# Altium PCB TIDA-01349-Interlock-Card_PCB.PcbDoc
Units mil, origin at the board's own origin, x right, y up, seen from the top; angles counter-clockwise.
Board outline 900 x 900 mil, 2 copper layers (Top Layer, Bottom Layer), stack 62 mil thick; 20 components, 17 nets, 76 pads, 19 vias.
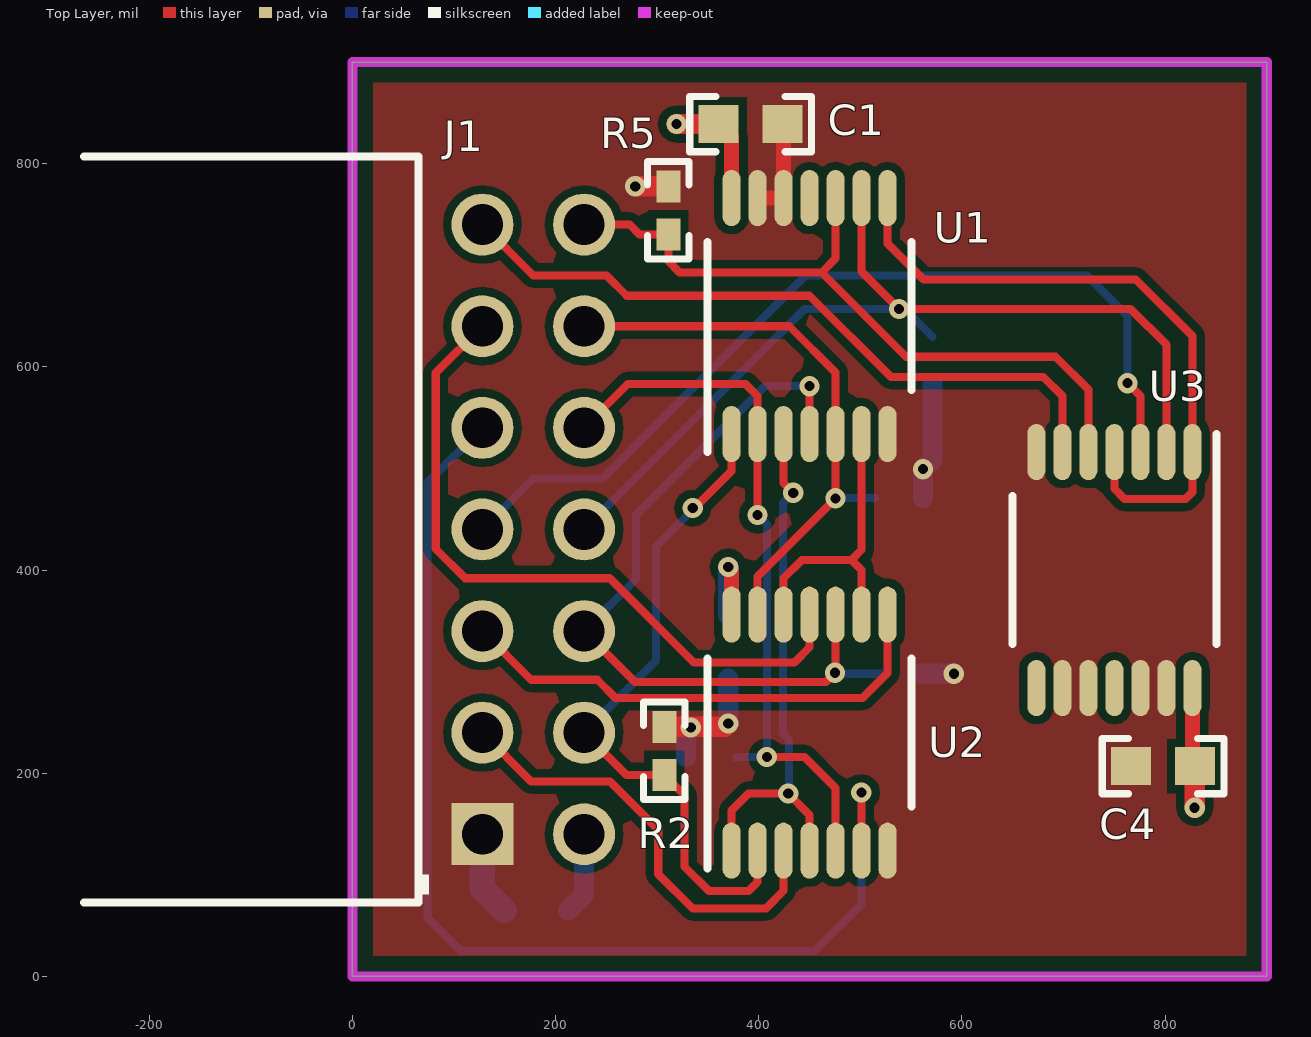
[diagram p0: Top Layer view]
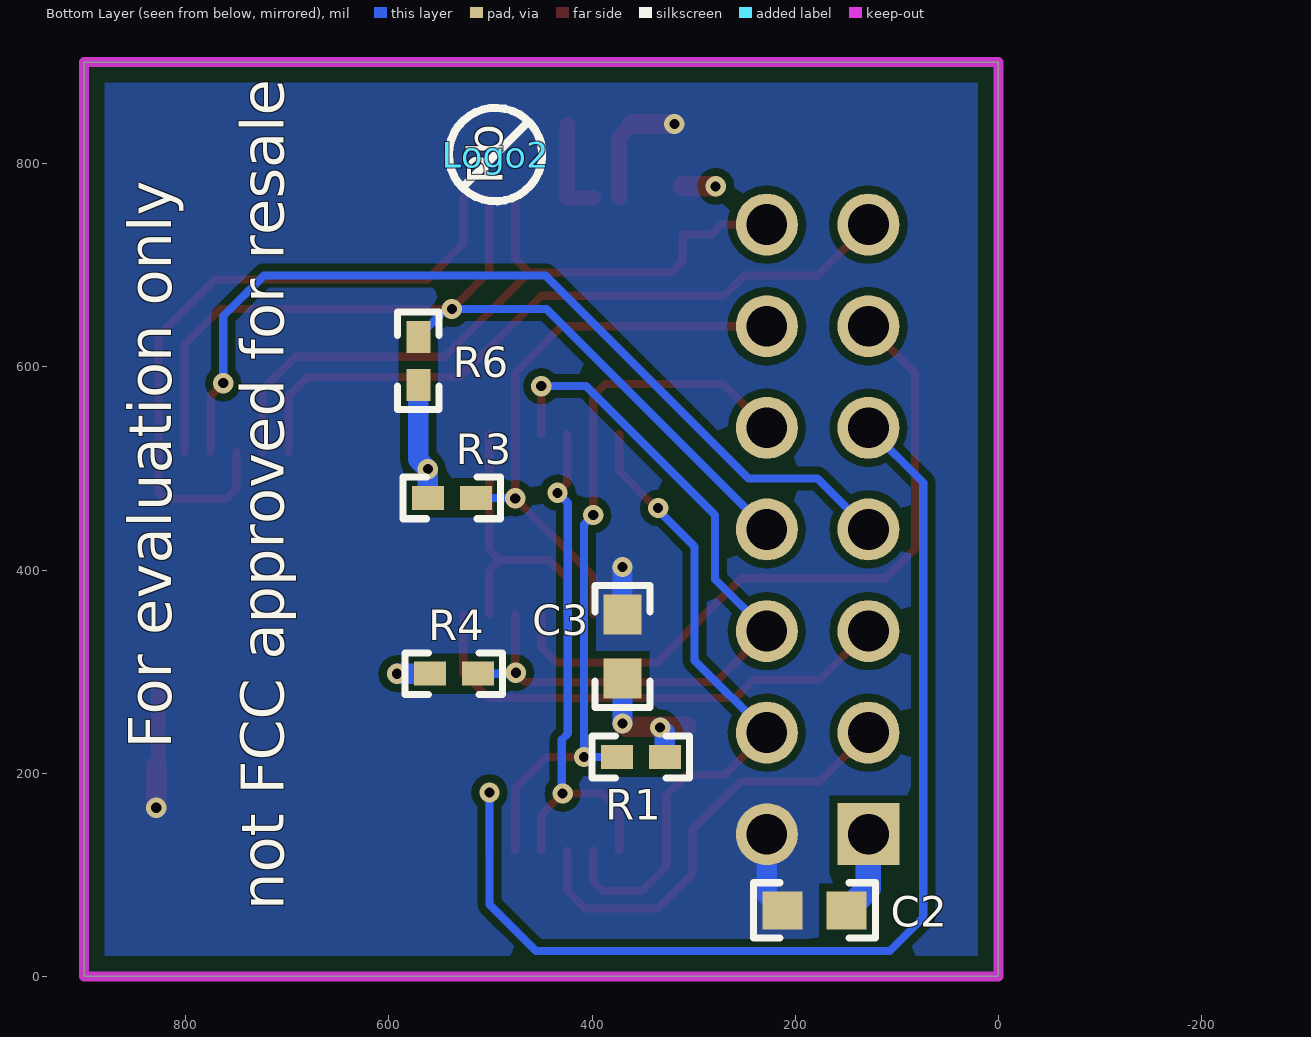
[diagram p1: Bottom Layer view, seen from below]

## Layer stack, top to bottom
Top Solder: solder mask 0.4, Solder Resist, Dk 3.5
Top Layer: signal copper 1.4
Dielectric1: core 59.2, FR-4 High Tg, Dk 4.8
Bottom Layer: signal copper 1.4
Bottom Solder: solder mask 0.4, Solder Resist, Dk 3.5

## Board outline
0,0 0,900 900,900 900,0

## Design rules (kind name [scope] priority, off if disabled: settings)
AcuteAngle [All] p1: minimum=4.50000000000000E+0001 checktracksonly=FALSE
AssemblyTestPointUsage [All] p1: valid=2
BoardOutlineClearance BoardOutlineClearance_MountingHoles [OnCopper and InComponentClass('Mounting Holes')] p1: gap=10 ignorepadtopadclearanceinfootprint=FALSE
BoardOutlineClearance BoardOutlineClearance_Poly [OnCopper and IsPoly] p2: gap=15 ignorepadtopadclearanceinfootprint=FALSE
BoardOutlineClearance [OnCopper and Not InComponentClass('Logo') and not InComponentClass('FiducialMark') and not InRegion(1000,500,4000,800) and not InPoly] p3: gap=10 ignorepadtopadclearanceinfootprint=FALSE
Clearance "Keepout to poly" [InPoly vs IsKeepOut] p1: gap=15 ignorepadtopadclearanceinfootprint=FALSE except(0: Arc-Hole Track-Hole SMDPad-Hole THPad-Hole Via-Hole Fill-Hole Poly-Hole Region-Hole Text-Hole)
Clearance Clearance_Keepouts [((IsTrack Or IsArc) And Not InPoly) And IsFree and IsKeepOut vs ((IsTrack Or IsArc) And Not InPoly) And IsFree and IsKeepOut] p2: gap=0 ignorepadtopadclearanceinfootprint=FALSE
Clearance Clearance_Poly [InPolygon] p3: gap=7.87 ignorepadtopadclearanceinfootprint=FALSE except(0: Arc-Hole Track-Hole SMDPad-Hole THPad-Hole Via-Hole Fill-Hole Poly-Hole Region-Hole Text-Hole)
Clearance Clearance_FiducialMark [IsKeepOut and InComponentClass('FiducialMark') vs IsPad and InComponentClass('FiducialMark')] p4: gap=0 ignorepadtopadclearanceinfootprint=FALSE
Clearance [All] p5: gap=7.87 ignorepadtopadclearanceinfootprint=FALSE except(0: Arc-Hole Track-Hole SMDPad-Hole THPad-Hole Via-Hole Fill-Hole Poly-Hole Region-Hole Text-Hole)
ComponentClearance ComponentClearance_MountingHoles_FiducialMarks [InComponentClass('Mounting Holes') vs InComponentClass('FiducialMark')] p1: gap=10 collisioncheckmode=3 verticalgap=10 showdistances=FALSE
ComponentClearance ComponentClearance_Shunt [InComponentClass('Header') vs InComponentClass('Shunt')] p2: gap=0 collisioncheckmode=3 verticalgap=0 showdistances=FALSE
ComponentClearance ComponentClearance_Logo [InComponentClass('Logo')] p3: gap=0 collisioncheckmode=3 verticalgap=0 showdistances=FALSE
ComponentClearance ComponentClearance_ScrewToNut [(HasFootprint('NY PMS 440 0025 PH')) vs (HasFootprint('Keystone_1902C'))] p4: gap=5 collisioncheckmode=3 verticalgap=10 showdistances=FALSE
ComponentClearance ComponentClearance_MountingHoles [InComponentClass('Mounting Holes')] p5: gap=10 collisioncheckmode=3 verticalgap=100000 showdistances=FALSE
ComponentClearance ComponentClearance_SmallPassives [HasFootprint('0201*') or HasFootprint('0402*') or HasFootprint('0508') or HasFootprint('0603*') or HasFootprint('0612') or HasFootprint('0805*') or HasFootprint('0815*') or HasFootprint('0830*') or HasFootprint('1206*') or HasFootprint('1210*') or HasFootprint('1808*') or HasFootprint('1812*') or HasFootprint('1825*') or HasFootprint('2010*') or HasFootprint('2220*') or HasFootprint('2225*') or HasFootprint('2512*') or HasFootprint('2728*') or HasFootprint('3518*') vs HasFootprint('0201*') or HasFootprint('0402*') or HasFootprint('0508') or HasFootprint('0603*') or HasFootprint('0612') or HasFootprint('0805*') or HasFootprint('0815*') or HasFootprint('0830*') or HasFootprint('1206*') or HasFootprint('1210*') or HasFootprint('1808*') or HasFootprint('1812*') or HasFootprint('1825*') or HasFootprint('2010*') or HasFootprint('2220*') or HasFootprint('2225*') or HasFootprint('2512*') or HasFootprint('2728*') or HasFootprint('3518*')] p6: gap=10 collisioncheckmode=3 verticalgap=10 showdistances=FALSE
ComponentClearance ComponentClearance_THtoSMT [IsThruComponent vs IsSMTComponent] p7: gap=10 collisioncheckmode=3 verticalgap=10 showdistances=FALSE
ComponentClearance ComponentClearance_THtoTH [IsThruComponent vs IsThruComponent] p8: gap=10 collisioncheckmode=3 verticalgap=10 showdistances=FALSE
ComponentClearance [All] p9: gap=0 collisioncheckmode=3 verticalgap=0 showdistances=FALSE
DiffPairsRouting [All] p1: maxlimit=100 minlimit=10 mostfreqgap=10 toplayer_minwidth=15 toplayer_maxwidth=15 toplayer_prefwidth=15 bottomlayer_minwidth=15 bottomlayer_maxwidth=15 bottomlayer_prefwidth=15 maxuncoupledlength=1000
FabricationTestPointUsage TestPointUsage [All] p1: valid=2 allowmultiple=FALSE
FabricationTestpoint Testpoint [All] p1: side=3 testpointundercomponent=TRUE minsize=40 maxsize=100 preferedsize=60 minholesize=0 maxholesize=40 preferedholesize=32 testpointgrid=1 allowsidetop=TRUE allowsidebottom=TRUE usegrid=TRUE gridtolerance=0.01
FanoutControl Fanout_LCC [IsLCC] p1: bgadir=Out bgaviamode=Centered fanoutstyle=Auto fanoutdirection=Alternating viagrid=1 // Fanout_LCC (Default Rule)
FanoutControl Fanout_BGA [IsBGA] p2: bgadir=Out bgaviamode=Centered fanoutstyle=Auto fanoutdirection=Alternating viagrid=1 // Fanout_BGA (Default Rule)
FanoutControl Fanout_Default [All] p4: bgadir=Out bgaviamode=Centered fanoutstyle=Auto fanoutdirection=Alternating viagrid=1 // Fanout_Default (Default Rule)
FanoutControl Fanout_Small [(CompPinCount < 5)] p5: bgadir=Out bgaviamode=Centered fanoutstyle=Auto fanoutdirection=OutThenIn viagrid=1 // Fanout_Small (Default Rule)
HoleSize [All] p1: absolutevalues=TRUE maxlimit=251 minlimit=7.87 maxpercent=80.000 minpercent=20.000
MinimumAnnularRing MinimumAnnularRing_ThermalPadVias [IsVia and InAnyComponent] p1: minimumring=5.91
MinimumAnnularRing [All] p2: minimumring=5
MinimumSolderMaskSliver MinimumSolderMaskSliver_Logo [InComponentClass('Logo') vs InComponentClass('Logo')] p1: minsoldermaskwidth=0.7
MinimumSolderMaskSliver [All] p2: minsoldermaskwidth=3.94
PlaneConnect [All] p1: planeconnectstyle=Direct reliefexpansion=10 reliefentries=4 reliefconductorwidth=10 reliefairgap=10
PolygonConnect [All] p1: connectstyle=Direct reliefconductorwidth=10 reliefentries=4 polygonreliefangle="90 Angle" airgapwidth=10
RoutingVias ThermalPadVias [IsVia and InAnyComponent] p1: holewidth=7.87 width=19.68 viastyle="Through Hole" minholewidth=7.87 minwidth=19.68 maxholewidth=12.99 maxwidth=23.62
RoutingVias [All] p2: holewidth=10 width=20 viastyle="Through Hole" minholewidth=7.87 minwidth=16 maxholewidth=12 maxwidth=24
SilkToBoardRegionClearance [Not ((IsComment or IsDesignator) And (Hide <> 'False')) and not InRegion(1000,500,4000,800)] p1:
SilkToSilkClearance SilkToSilkClearance_Pb-FreeLogo [(HasFootprint('Pb-Free_Overlay_Medium') OR HasFootprint('Pb-Free_Overlay_Small')) vs (HasFootprint('Pb-Free_Overlay_Medium') OR HasFootprint('Pb-Free_Overlay_Small'))] p1: silktosilkclearance=0
SilkToSilkClearance [All] p2: silktosilkclearance=4
SilkToSolderMaskClearance SilkToComponentPadClearance [(IsPad or IsFill or IsRegion) and InAnycomponent] p1: minsilkscreentomaskgap=5 clearancetoexposedcopper=TRUE
SilkToSolderMaskClearance "Silk to Solder Mask Opening" [All] p2: minsilkscreentomaskgap=4 clearancetoexposedcopper=FALSE
SolderMaskExpansion [All] p1: expansion=1.97
Width [All] p1: maxlimit=100 minlimit=6 preferedwidth=8 checkconnectedcopper=TRUE
15 further rules are at their usual default settings.

## Classes and differential pairs
component class TIDA-01349-Interlock-Card: C1 C2 C3 C4 J1 R1 R2 R3 R4 R5 R6 U1 U2 U3
component class AssemblyNote: ZZ1 ZZ2 ZZ3 ZZ4
component class TIDA-01349-Interlock-Card_EVM_Hardware: Logo2 Logo3 ZZ1 ZZ2 ZZ3 ZZ4

## Components (designator, comment, footprint, x,y, rotation, side; value= is the part's Value field where it differs from the comment)
C1 "C0603C104K5RACTU" 0603 392,839 r180 top value=0.1uF
C2 "C0603C104K5RACTU" 0603 181,65 r0 bottom value=0.1uF
C3 "C0603C104K5RACTU" 0603 370,324.64 r90 bottom value=0.1uF
C4 "C0603C104K5RACTU" 0603 798,207 r0 top value=0.1uF
J1 "PPTC072LJBN-RC" Sullins_xPxC072LJBN -270,440 r180 top
Logo2 "Pb-Free Symbol" Pb-Free_Overlay_Small 495,809 r90 bottom
Logo3 "FCC disclaimer" FCC_disclaimer 143,1544 r0 top
R1 "CRCW040210K0FKED" 0402 352,216 r0 bottom value=10.0k
R2 "CRCW040210K0FKED" 0402 307,222 r270 top value=10.0k
R3 "CRCW040210K0FKED" 0402 538,471 r180 bottom value=10.0k
R4 "CRCW040210K0FKED" 0402 536,298 r180 bottom value=10.0k
R5 "CRCW040210K0FKED" 0402 311,754 r270 top value=10.0k
R6 "CRCW040210K0FKED" 0402 571,606 r90 bottom value=10.0k
U1 "SN74LVC86APW" PW0014A_N 450,650 r90 top
U2 "SN74LVC08APW" PW0014A_N 450,240 r90 top
U3 "SN74LVC08APW" PW0014A_N 750,400 r270 top
ZZ1 "This Assembly Note is for PCB labels only" AssemblyNoteLabel 185,3938 r0 top
ZZ2 "These assemblies are ESD sensitive, ESD precautions shall be observed." AssemblyNote 185,3829.11 r0 top
ZZ3 "These assemblies must be clean and free from flux and all contaminants. Use of no clean flux is not acceptable." AssemblyNote 185,3740.56 r0 top
ZZ4 "These assemblies must comply with workmanship standards IPC-A-610 Class 2, unless otherwise specified." AssemblyNote 185,3652 r0 top

## Footprints (in the part's own frame and the unit in brackets; to place one, negate y for a bottom-side part, rotate by r counter-clockwise, add the part's x,y. Pads: shape width x height; smd on the part's side, far side on the other; paste and mask are expansions set on the pad)
0402 [mm] "0402 from SM-752 data"
  rect 0.8x0.6 smd: 1(-0.6,0) 2(0.6,0)
  silkscreen extent -1.22,-0.52 1.22,0.52, body extent -0.55,-0.3 0.55,0.3, height 0.6
0603 [mm] "0603 from SM-752 data"
  rect 1x0.95 smd: 1(-0.8,0) 2(0.8,0)
  silkscreen extent -1.52,-0.69 1.52,0.69, body extent -0.87,-0.47 0.87,0.47, height 1
AssemblyNote [mil] "Assembly Note"
AssemblyNoteLabel [mil] "Assembly Note for PCB Labels"
FCC_disclaimer [mil]
Pb-Free_Overlay_Small [mil]
  silkscreen extent -46,-46 46,46
PW0014A_N [mm] "TSOP, 14-Leads, Body 5x4.4mm, Pitch 0.65mm, IPC Medium Density"
  oval 1.4x0.45 smd: 1(-2.95,1.95) 2(-2.95,1.3) 3(-2.95,0.65) 4(-2.95,0) 5(-2.95,-0.65) 6(-2.95,-1.3) 7(-2.95,-1.95) 8(2.95,-1.95) 9(2.95,-1.3) 10(2.95,-0.65) 11(2.95,0) 12(2.95,0.65) 13(2.95,1.3) 14(2.95,1.95)
  silkscreen extent -3.4,-2.55 1.85,2.55, body extent -3.21,-2.5 3.21,2.5, height 1
Sullins_xPxC072LJBN [mm] "Receptacle, 2.54mm, 7x2, R/A, TH"
  rect 1.55x1.55 hole 1.02: 1(-10.109,7.62)
  round 1.55 hole 1.02: 2(-12.649,7.62) 3(-10.109,5.08) 4(-12.649,5.08) 5(-10.109,2.54) 6(-12.649,2.54) 7(-10.109,0) 8(-12.649,0) 9(-10.109,-2.54) 10(-12.649,-2.54) 11(-10.109,-5.08) 12(-12.649,-5.08) 13(-10.109,-7.62) 14(-12.649,-7.62)
  silkscreen extent -8.78,-9.32 -0.15,9.32, body extent -12.85,-9.32 0,9.32, height 5.08

## Part data
C1 C2 C3 C4: library part CMP-0006861-2, "CAP, CERM, 0.1 uF, 50 V, +/- 10%, X7R, 0603", Cap_Case=0603, Manufacturer=Kemet, Supplier Part Number 1=399-5089-1-ND, TempCo=X7R, Tolerance_%=10%, Value1=Unknown, Value2=50V, ValueDisplayed=0.1uF, AEC Category=Q200, AEC Qualified=?, Cap_F=100nF, ComponentLink1Description="Datasheet link", ComponentLink1URL=http://www.kemet.com/kemet/web/homepage/kechome.nsf/vapubfiles/F3102_Y5V.pdf/$file/F3102_Y5V.pdf, CompType=Capacitor, LatestRevisionDate=2017-03-09, MountType=SMT, PackageReference=0603, PartNumber=C0603C104K5RACTU, Polarized=N, Published=2008-06-19, Publisher="Texas Instruments", RoHS=Y, SizeArea_mm2=1.28, SizeAreaWB_mm2=4.68, SizeX_mm=1.6, SizeY_mm=0.8, SizeZ_mm=1, Supplier 1=Digi-Key, Supplier 2=Mouser, Supplier 3=Farnell, Supplier Part Number 2=80-C0603C104K5R, Supplier Part Number 3=1288255, TaMax_C=125°C, TaMin_C=-55°C, Technology=Ceramic, U/M=EA, VDC_V=50V
J1: library part CMP-0054673-1, "Receptacle, 2.54mm, 7x2, Tin, Black, R/A, TH", Color=Black, Current_A=3A, Manufacturer="Sullins Connector Solutions", Supplier Part Number 1=S5521-ND, Voltage_V=250V, Cert_UL=Y, CNHeader=FALSE, ComponentLink1Description="Datasheet URL", ComponentLink1URL=http://sullinscorp.com/drawings/101_P(N)PxCxx2LJBN-RC,_10494-H.pdf, CompType="Socket Strip", ContactFinish=Tin, CT=TRUE, Gender=Female, LatestRevisionDate=26/05/2017, MountType=TH, Orientation=R/A, PackageReference="Receptacle, 2.54mm, 7x2, R/A, TH", PartNumber=PPTC072LJBN-RC, PinCount=14, Pitch_mm=2.54, Publisher="Texas Instruments", RoHS=Y, Row_Count=2, RowSpacing_mm=2.54, Supplier 1=Digi-Key
Logo2: library part CMP-0074839-1, LatestRevisionDate=2017-07-06, Lib Reference=Pb-Free, PartNumber="Pb-Free Symbol", Published=2009-03-03, Publisher="Texas Instruments", SymbolCreator=a0412235, SymbolVersion=2011-08-22
Logo3: library part CMP-0074847-1, "FCC_disclaimer", LatestRevisionDate=2017-07-06, Lib Reference=FCC_disclaimer, PartNumber="FCC disclaimer", Published=2009-03-03, Publisher="Texas Instruments"
R1 R2 R3 R4 R5 R6: library part CMP-0025958-2, "RES, 10.0 k, 1%, 0.063 W, 0402", Manufacturer=Vishay-Dale, Power_W=63mW, Supplier Part Number 1=541-10.0KLCT-ND, TempCo="100 ppm/C", Tolerance_%=1%, Value2=0.063W, Value_Code=10k0, ValueDisplayed=10.0k, AEC Category=Q200, AEC Qualified=?, ComponentLink1Description="Datasheet link", ComponentLink1URL=http://www.vishay.com/docs/20035/dcrcwe3.pdf, CompType=Resistor, EIA_Code=E96, LatestRevisionDate=2017-03-09, MountType=SMT, PackageReference=0402, PartNumber=CRCW040210K0FKED, Published=2008-06-26, Publisher="Texas Instruments", Res_ohm=10k, RoHS=Y, SizeArea_mm2=0.5, SizeX_mm=1, SizeY_mm=0.5, SizeZ_mm=0.6, Supplier 1=Digi-Key, Supplier 2=Newark, Supplier 3=Mouser, Supplier Part Number 2=52K6595, Supplier Part Number 3=71-CRCW0402-10K-E3, Technology="Thick Film", U/M=EA, Value1=1%, VDC_V=50V
U1: library part CMP-0053460-1, "Quadruple 2-Input Exclusive-OR Gate, PW0014A, TUBE", F @ Nom Voltage(Max)(Mhz)=70, Generic Part Number=SN74LVC86A, ICC @ Nom Voltage(Max)(mA)=0.01, Manufacturer="Texas Instruments", Operating Temperature Range(C)="-40 to 125", Rating=Catalog, tpd @ Nom Voltage(Max)(ns)=9.9,7.6,5.6,4.6, Voltage(Nom)(V)=1.8,2.5,2.7,3.3, Bits(#)=4, DatasheetVersion=SCAS288P, Input Type=TTL, Output Drive (IOL/IOH)(Max)(mA)=24/-24, Output Type=TTL, PackageReference=PW0014A, PartId=1, Schmitt Trigger=No, Technology Family=LVC, VCC(Max)(V)=3.6, VCC(Min)(V)=1.65
U2 U3: library part CMP-0054498-1, "Quadruple 2-Input Positive-AND Gate, PW0014A, TUBE", F @ Nom Voltage(Max)(Mhz)=70, Generic Part Number=SN74LVC08A, ICC @ Nom Voltage(Max)(mA)=0.01, Manufacturer="Texas Instruments", Operating Temperature Range(C)="-40 to 125", Rating=Catalog, tpd @ Nom Voltage(Max)(ns)=9.8,6.9,4.8,4.1, Voltage(Nom)(V)=1.8,2.5,2.7,3.3, Bits(#)=4, DatasheetVersion=SCAS283Q, Input Type=TTL, Output Drive (IOL/IOH)(Max)(mA)=-24/24, Output Type=TTL, PackageReference=PW0014A, PartId=1, Schmitt Trigger=No, Technology Family=LVC, VCC(Max)(V)=3.6, VCC(Min)(V)=1.65
ZZ1: library part CMP-0003616-3, ClassName=AssemblyNote, CompType=AssemblyNote, Key=AssemblyNoteLabel, LatestRevisionDate=2017-03-09, Publisher="Texas Instruments"
ZZ2: library part CMP-0077236-1, ClassName=AssemblyNote, CompType=AssemblyNote, Key=AssemblyNote, LatestRevisionDate=2017-08-10, Publisher="Texas Instruments"
ZZ3: library part CMP-0077237-1, ClassName=AssemblyNote, CompType=AssemblyNote, Key=AssemblyNote, LatestRevisionDate=2017-08-10, Publisher="Texas Instruments"
ZZ4: library part CMP-0077238-1, ClassName=AssemblyNote, CompType=AssemblyNote, Key=AssemblyNote, LatestRevisionDate=2017-08-10, Publisher="Texas Instruments"

## Via types
v1: diameter 20, hole 10, Top Layer to Bottom Layer, 19 vias

## Nets (pads, with @x,y where several pads share a name; then routed paths per layer and width w, separated by ;. In a path a pad name is that pad's centre, name@x,y a point inside that pad or via, vN(x,y) a via of type N, cw(c..) or ccw(c..) an arc to the next point about the centre after c; other vN are vias at no path point)
3V3: C1.2 C2.2 C3.2 C4.2 J1.2 U1.14 U2.14 U3.14 | length 415.3
  Top Layer w15: C1.2 373.23,826.28 U1.14 ; v1(370,403) 373.23,399.77 U2.14 ; U3.14 826.77,209.72 C4.2
  Top Layer w20: v1(319,839) C1.2 ; v1(829,166) 829,206.5 C4.2
  Bottom Layer w20: C2.2 228,80.5 J1.2 ; C3.2 v1(370,403)
GND: C1.1 C2.1 C3.1 C4.1 J1.1 R1.1 R2.1 R3.1 R4.1 R5.1 R6.1 U1.7 U1.12 U1.13 U2.7 U3.7 U3.9 U3.10 U3.12 U3.13 | length 501.2
  Top Layer w15: U1.13 U1.12 C1.1@424.41,838.09
  Top Layer w20: v1(278.38,777.62) R5.1 ; R2.1 366.62,245.62 v1(370,249)
  Bottom Layer w20: R1.1 328.38,240.38 v1(333,245) ; v1(370,249) C3.1 ; R4.1 v1(592,298) ; R3.1 v1(561.62,499.38) 571,508.76 R6.1
  Bottom Layer w25: J1.1 128,86.5 C2.1
NetU1_3: U1.3 U2.1 U2.4 | length 531.8
  Top Layer w8: U2.1 373.23,163.23 390,180 v1(429,180) 450,159 U2.4 ; U1.3 424.41,485.59 v1(434,476)
  Bottom Layer w8: v1(429,180) 429.87,180.87 429.87,233 423.87,239 423.87,465.87 v1(434,476)
NetU1_6: U1.6 U2.9 U2.12 | length 296.1
  Top Layer w8: U2.12 424.41,391.96 442.45,410 491.18,410 ; U2.9 501.18,400 491.18,410 ; U1.6 501.18,420 491.18,410
NetU1_8: U1.8 U3.1 U3.4 | length 655.9
  Top Layer w8: U1.8 526.77,721.23 562,686 771,686 826.77,630.23 U3.1 826.77,476.77 820,470 760,470 750,480 U3.4
PWM_U_B: J1.10 R1.2 U1.2 U2.5 | length 725.1
  Top Layer w8: J1.10 271,583 387,583 398.82,571.18 U1.2 v1(398.82,454.18) ; v1(408,216) 445,216 475.59,185.41 U2.5
  Bottom Layer w8: R1.2@377.62,215 378.62,216 v1(408,216) 408,445 v1(398.82,454.18)
PWM_U_T: J1.4 R2.2 U1.1 U2.2 | length 666.5
  Top Layer w8: J1.4 269.62,198.38 R2.2 327,178.38 327,108 351,84 390,84 398.82,92.82 U2.2 ; v1(335,461) 336.89,461 373.23,497.34 U1.1
  Bottom Layer w8: J1.4 299,311 299,423.11 335,459.11 v1(335,461)
PWM_UB: J1.9 U2.6 | length 1131.3
  Top Layer w8: v1(501,181) 501.18,180.82 U2.6
  Bottom Layer w8: J1.9 74,486 74,58 107,25 455,25 501,71 v1(501,181)
PWM_UT: J1.3 U2.3 | length 440.2
  Top Layer w8: J1.3 176,192 253.55,192 301,144.55 301,101 335,67 407,67 424.41,84.41 U2.3
PWM_V_B: J1.12 R3.2 U1.5 U2.13 | length 575.5
  Top Layer w8: J1.12 430,640 475.59,594.41 U1.5 v1(475.59,470.59) 398.82,393.82 U2.13
  Bottom Layer w8: v1(475.59,470.59) 476,471 R3.2
PWM_V_T: J1.6 R4.2 U1.4 U2.10 | length 788.5
  Top Layer w8: J1.6 278,290 466,290 v1(475,299) ; U1.4 v1(450,581) ; v1@475,293 v1(475,299) ; U2.10 475.59,299.59 v1(475,299)
  Bottom Layer w8: J1.6 279,391 279,454 406,581 v1(450,581) ; v1(475,299) 476,298 R4.2 R4.2@522.38,298
PWM_VB: J1.11 U2.11 | length 690.8
  Top Layer w8: J1.11 82,594 82,421 111,392 253,392 336,309 435,309 450,324 U2.11
PWM_VT: J1.5 U2.8 | length 493.7
  Top Layer w8: J1.5 176,292 241,292 259,274 502,274 526.77,298.77 U2.8
PWM_W_B: J1.14 R5.2 U1.10 U3.5 | length 719.4
  Top Layer w8: J1.14 273,740 282.62,730.38 R5.2 311,704 322,693 462,693 ; U1.10 475.59,706.59 462,693 ; U3.5 724.41,577.59 692,610 545,610 462,693
PWM_W_T: J1.8 R6.2 U1.9 U3.2 | length 952
  Top Layer w8: U1.9 501.18,693.82 v1(538,657) 766,657 801.18,621.82 U3.2
  Bottom Layer w8: J1.8 445,657 v1(538,657) 543.62,657 R6.2
PWM_WB: J1.13 U3.6 | length 695.8
  Top Layer w8: J1.13 178,690 250,690 270,670 450,670 530,590 680,590 698.82,571.18 U3.6
PWM_WT: J1.7 U3.3 | length 894.2
  Top Layer w8: v1(763,584) 775.59,571.41 U3.3
  Bottom Layer w8: J1.7 178,490 246,490 446,690 723,690 763,650 v1(763,584)
pads on no net: U1.11 U3.8 U3.11

## Polygon pours and split planes (outlines as drawn)
GND on Top Layer "TOP_LAYER_GND_P002" (solid, remove dead copper, pour order 2): 0,900 0,0 900,0 900,899 899,900
3V3 on Bottom Layer "BOTTOM_LAYER_3V3_P004" (solid, remove dead copper, pour order 4): 0,899 0,-1 899,-1 900,0 900,899 899,900 1,900

## Keep-outs
Keep-Out Layer:
  the board outline again, w10
  text ".Layer_Name" at 577,-858.49 h60

## Other copper
Top Layer:
  text ".Layer_Name" at 577,-858.49 h60
Bottom Layer:
  text ".Layer_Name" at 577,-858.49 h60

## Silkscreen, mask and mechanical layers (free items; w line width, h text height)
Top Overlay:
  text ".Layer_Name" at 577,-858.49 h60
Bottom Overlay:
  text "For evaluation only" at 800,224 h72.83 r270
  text "not FCC approved for resale" at 689,65 h72.83 r270
  text ".Layer_Name" at 577,-858.49 h60
Top Paste:
  text ".Layer_Name" at 577,-858.49 h60
Bottom Paste:
  text ".Layer_Name" at 577,-858.49 h60
Top Solder:
  text ".Layer_Name" at 577,-858.49 h60
  text ".Layer_Name" at 577,-858.49 h60
Bottom Solder:
  text ".Layer_Name" at 577,-858.49 h60
Drill Guide:
  text ".Layer_Name" at 577,-858.49 h60
M1 Board Outline:
  the board outline again, w10
M2 Board Dimensions:
  rectangle: 125,-400 500,-275
  rectangle: 0,-275 125,-150
  lines w7: 0,-275 1000,-275 ; 125,-400 125,-150 ; 250,-400 250,-150 ; 500,-400 500,-150 ; 750,-400 750,-150 ; 0,-400 0,-150 1000,-150 1000,-400 0,-400
M3 3D STEP Top:
  text ".Layer_Name" at 577,-858.49 h60
M4 3D STEP Bottom:
  text ".Layer_Name" at 577,-858.49 h60
M5 Assembly Top:
  lines w10: -292,-930.17 6308,-930.17 ; -292,-726.83 6310,-726.83 ; -292,-523.5 -292,-1133.5 3713,-1133.5 6310,-1133.5 6310,-523.5 -291.5,-523.5 -291.5,-1133.5 1284,-1133.5 ; 2173,-1133.5 2173,-523.5 ; 3440,-726.83 3440,-523.5 ; 4280,-726.83 4280,-523.5 ; 4902,-1140 4902,-937.17
  text "COMPONENTS MARKED 'DNP' SHOULD NOT BE POPULATED." at 1153.5,-318.5 h60
  text "ASSEMBLY VARIANT:" at 1153,-434 h60
  text ".VariantName" at 2189,-434 h60
  text "PCB VIEWED FROM TOP SIDE" at -228.5,-655.67 h60
  text "BOARD #:" at 2248,-655.67 h60
  text ".PRJ_Number" at 2793.5,-655.67 h60
  text "REV:" at 3638,-655.67 h60
  text ".PCB_Rev" at 3929.5,-655.67 h60
  text "SVN REV:" at 4476,-655.67 h60
  text ".VersionControl_RevNumber" at 4982,-655.67 h60
  text "'.Layer_Name'" at 630,-856 h60
  text "TID #:" at 2248,-859 h60
  text ".TID" at 2793.5,-859 h60
  text "PLOT NAME =" at -228.5,-1064.34 h60
  text ".plot_File_Name" at 577,-1064.34 h60
  text "GENERATED    :" at 2250,-1064.34 h60
  text ".Print_Date" at 3119.5,-1064.34 h60
  text ".Print_Time" at 3848.5,-1064.34 h60
  text "TEXAS INSTRUMENTS" at 5113,-1064.34 h60
M6 Assembly Bottom:
  lines w10: -292.5,-727.33 6309.5,-727.33 ; -290.5,-930.67 6309.5,-930.67 ; 1115.5,-1140.5 1115.5,-937.67 ; 1737.5,-727.33 1737.5,-524 ; 2577.5,-727.33 2577.5,-524 ; 3844.5,-1134 3844.5,-524 ; 4733.5,-1134 6309,-1134 6309,-524 -292.5,-524 -292.5,-1134 2304.5,-1134 6309.5,-1134 6309.5,-524
  text "COMPONENTS MARKED 'DNP' SHOULD NOT BE POPULATED." at 6102,-318 h60
  text ".VariantName" at 5058,-434 h60
  text "ASSEMBLY VARIANT:" at 6097,-434 h60
  text ".VersionControl_RevNumber" at 1035.5,-656.17 h60
  text "SVN REV:" at 1541.5,-656.17 h60
  text ".PCB_Rev" at 2088,-656.17 h60
  text "REV:" at 2379.5,-656.17 h60
  text ".PRJ_Number" at 3224,-656.17 h60
  text "BOARD #:" at 3769.5,-656.17 h60
  text "PCB VIEWED FROM BOTTOM SIDE" at 6246,-656.17 h60
  text ".TID" at 3224,-859.5 h60
  text "TID #:" at 3769.5,-859.5 h60
  text "'.Layer_Name'" at 570,-861 h60
  text "TEXAS INSTRUMENTS" at 904.5,-1064.84 h60
  text ".Print_Time" at 2169,-1064.84 h60
  text ".Print_Date" at 2898,-1064.84 h60
  text "GENERATED    :" at 3767.5,-1064.84 h60
  text ".plot_File_Name" at 5440.5,-1064.84 h60
  text "PLOT NAME =" at 6246,-1064.84 h60
M9 Title Sheet:
  drawing of 57 lines, arcs and shapes, not listed
  text "1" at 739.84,8036.5 h70
  text "2" at 3235.5,8036.5 h70
  text "3" at 5724.84,8036.5 h70
  text "4" at 8231.51,8036.5 h70
  text "5" at 10730.5,8036.5 h70
  text "6" at 13235.5,8036.5 h70
  text "A" at -416.5,6893.5 h70
  text "A" at 14383.5,6893.5 h70
  text "B" at -416.5,4513.5 h70
  text "B" at 14383.5,4513.5 h70
  text "C" at -416.5,2138.5 h70
  text "C" at 14383.5,2138.5 h70
  text "PROJECT TITLE:" at 11343.5,277.5 h45
  text ".PRJ_Title" at 11393.5,144.17 h70
  text "DESIGNED FOR:" at 11343.5,-23.5 h45
  text ".PRJ_Customer" at 11393.5,-163.5 h70
  text "D" at -416.5,-231.5 h70
  text "D" at 14383.5,-231.5 h70
  text "FILE NAME:" at 11343.5,-323.5 h45
  text ".PCB_File_Name_No_Path" at 11393.5,-443.5 h70
  text "Texas Instruments (TI) and/or its licensors do not warrant the accuracy or completeness of this specification" at 6374,-605.34 h45
  text "ENGINEER:" at 11343.5,-613.5 h45
  text "LAYOUT BY:" at 12848.5,-613.5 h45
  text "or any information contained therein. TI and/or its licensors do not warrant that this design will meet" at 6329.01,-718 h45
  text ".PRJ_Engineer" at 11393.5,-768.49 h70
  text ".PCB_Layout" at 12899,-768.49 h70
  text "the specifications, will be suitable for your application or fit for any particular purpose, or will operate in" at 6329.01,-830.67 h45
  text "ALTIUM DESIGNER VERSION:" at 12848.5,-923.5 h45
  text "an implementation. TI and/or its licensors do not warrant that the design is production worthy. You should" at 6329.01,-943.33 h45
  text "completely validate and test your design implementation to confirm the system functionality for your application." at 6374,-1056 h45
  text ".print_Scale" at 11393.5,-1056.83 h70
  text ".Application_BuildNumber" at 12899,-1056.83 h70
  text "1" at 739.84,-1263.5 h70
  text "2" at 3235.5,-1263.5 h70
  text "3" at 5724.84,-1263.5 h70
  text "4" at 8231.51,-1263.5 h70
  text "5" at 10730.5,-1263.5 h70
  text "6" at 13235.5,-1263.5 h70
M10 Fab Notes:
  drawing of 189 lines, arcs and shapes, not listed
  text "DESIGN INFORMATION" at 12382.02,6356.17 h60
  text "MIN. TRACK WIDTH:" at 11737.46,6224.05 h60
  text "8" at 12833.7,6224.05 h60
  text "MIL" at 12988.46,6224.05 h60
  text "MIN. CLEARANCE:" at 11737.46,6099.92 h60
  text "0.2" at 12773.7,6099.93 h60
  text "mm" at 12988.46,6099.92 h60
  text "MIN. VIA PAD SIZE:" at 11737.46,5975.8 h60
  text "20" at 12803.71,5975.8 h60
  text "MIL" at 12988.46,5975.8 h60
  text "0.05mm (2MIL)" at 12432.46,5845.9 h60
  text "MINIMUM ANNULAR RING" at 11408.23,5837.67 h60
  text "EXTERNAL" at 13140.46,5837.67 h60
  text "PER" at 11608.23,5727.55 h60
  text "IPC-D-275 CLASS 2 LEVEL C" at 11828.23,5727.54 h60
  text "MIL, HOLES" at 13316.46,5627.07 h60
  text "+/-" at 12924,5618.48 h60
  text "+/-" at 13778,5618.48 h60
  text "REGISTRATION TOLERANCES:" at 11408.23,5617.42 h60
  text "METAL" at 12608,5617.42 h60
  text "5" at 13184.2,5617.42 h60
  text "3" at 14017.2,5617.42 h60
  text "MIL" at 14133.46,5617.42 h60
  text "HOLE SIZE TOLERANCE (UNLESS OTHERWISE SPECIFIED):" at 11408.23,5519.1 h60
  text "+/-" at 13778,5516.23 h60
  text "3" at 14017.2,5515.17 h60
  text "MIL" at 14133.46,5515.17 h60
  text "MATERIAL:" at 11333.46,5377.52 h60
  text "FR-4 High Tg" at 12319.9,5249 h60
  text "X" at 12175.46,5241.01 h60
  text "FR-408" at 11754.46,5236.49 h60
  text "OTHER" at 13242.46,5236.49 h60
  text "62 MIL (1.6mm) +/-10%" at 12074.56,5093.46 h60
  text "X" at 11954.46,5091.01 h60
  text "THICKNESS:" at 11408.23,5085.24 h60
  text "OTHER" at 13359.46,5085.24 h60
  text "TOLERANCE:" at 11408.23,4946.92 h60
  text "X" at 12256.46,4946.92 h60
  text "ANSI IPC-6012 TYPE 3 CLASS 2" at 12434.48,4946.92 h60
  text "OTHER +/-" at 12434.46,4802.73 h60
  text "BOW & TWIST:" at 11408.23,4657.54 h60
  text "X" at 12256.46,4657.54 h60
  text "ANSI IPC-6012 TYPE 3 CLASS 2" at 12434.48,4657.54 h60
  text "OTHER +/-" at 12434.46,4510.85 h60
  text "DRILLING:" at 11333.46,4380.23 h60
  text "NC_DRILL FILES" at 13094.46,4275.04 h60
  text "REFERENCE:" at 11408.23,4271.1 h60
  text "X" at 12065.46,4271.01 h60
  text "AS SHOWN" at 12243.46,4271.1 h60
  text "X" at 12966.46,4271.1 h60
  text "OTHER" at 13392.46,4128.85 h60
  text "PTH COPPER THICKNESS:" at 11407.91,4125.32 h60
  text "X" at 12547.14,4125.32 h60
  text "20-30 um" at 12675.14,4125.32 h60
  text "BOARD FINISH:" at 11333.46,3977.73 h60
  text "SILKSCREEN:" at 11488.68,3867.6 h60
  text "X" at 12446.46,3867.6 h60
  text "TOP" at 12563.46,3867.6 h60
  text "X" at 12956.46,3867.6 h60
  text "BOTTOM" at 13074.46,3867.6 h60
  text "SILKSCREEN COLOR:" at 11488.68,3712.41 h60
  text "X" at 12445.46,3712.41 h60
  text "WHITE" at 12563.46,3712.41 h60
  text "OTHER" at 13074.46,3712.41 h60
  text "X" at 12576.46,3568.96 h60
  text "GREEN" at 12694.46,3568.96 h60
  text "OTHER" at 13312.46,3568.96 h60
  text "SOLDER RESIST COLOR:" at 11488.68,3562.1 h60
  text "X" at 12576.46,3414.71 h60
  text "MATTE" at 12694.46,3414.71 h60
  text "SEMI-GLOSS" at 13312,3414.07 h60
  text "IMMERSION GOLD (ENIG)" at 12394.46,3241.94 h60
  text "ENEPIG" at 13732,3234.72 h60
  text "SURFACE FINISH:" at 11333.46,3233.72 h60
  text "X" at 12216.46,3233.72 h60
  text "IMM. TIN/SILVER OR EQUIV" at 11663,3096.4 h60
  text "OTHER" at 13094.46,3092.47 h60
  text "ARRAY/PANEL:" at 11333.46,2937.09 h60
  text "CUT AND TRIM PER M1 BOARD OUTLINE" at 12394.46,2928.87 h60
  text "X" at 12206,2926 h60
  text "N.C. ROUTE" at 12394.46,2792.9 h60
  text "V. SCORE" at 13260.46,2792.9 h60
  text "CERTIFICATION:" at 11333.46,2663.77 h60
  text "MATERIALS AND WORKMANSHIP FOR ALL PCBS" at 12058.46,2663.77 h60
  text "TO MEET OR EXCEED THE REQUIREMENTS OF:" at 12058.46,2569.71 h60
  text "X" at 11695.97,2441.08 h60
  text "ANSI IPC-A-600F CLASS ->" at 11823.96,2441.08 h60
  text "X" at 13471.97,2441.08 h60
  text "2" at 13581.96,2441.08 h60
  text "1" at 13266.96,2439.58 h60
  text "3" at 13935.96,2439.58 h60
  text "X" at 12507.97,2293.39 h60
  text "RoHS" at 12635.96,2293.39 h60
  text "OTHER" at 13280.36,2293.39 h60
  text "PER ORDER" at 13677.42,2293.39 h60
  text "ALL BOARDS MUST MEET OR EXCEED UL94-V0 REQUIREMENTS." at 11361,2139.57 h60
  text "PCB MUST BEAR THE UL94V-0 UL REGISTERED MATERIAL ID NUMBER" at 11361,2023.5 h60
  text "ADDITIONAL REQUIREMENTS:" at 11333.46,1854.08 h60
  text "MICROSECTION:" at 11408.23,1746.95 h60
  text "YES" at 12313.96,1746.95 h60
  text "REQUIRED" at 13175.46,1602.62 h60
  text "BARE BOARD ELEC. TEST:" at 11408.23,1599.76 h60
  text "NONE" at 12713.96,1599.76 h60
  text "X" at 13057.46,1599.76 h60
  text "PER ORDER" at 13767.46,1599.76 h60
  text "XX MIL VIAS REQUIRE NON-CONDUCTIVE FILL AND PLANARIZE" at 11576.38,1394.82 h59
  text "XX MIL VIAS REQUIRE CONDUCTIVE FILL AND PLANARIZE" at 11584.38,1290.84 h60
  text "OUTER XX MIL VIAS REQUIRE 50 OHM SINGLE-ENDED IMPEDANCE" at 11583.39,1127.46 h58
  text "LAYER 2 & 3 (INNER LAYERS) XX MIL WIDE, XX MIL SPACE / TRACES REQUIRE 100 OHM DIFFERENTIAL IMPEDANCE" at 11575.39,891.74 h60
M11 Gerber Information:
  lines w10: -292,-930.17 6308,-930.17 ; -292,-726.83 6310,-726.83 ; -292,-523.5 -292,-1133.5 3713,-1133.5 6310,-1133.5 6310,-523.5 -291.5,-523.5 -291.5,-1133.5 1284,-1133.5 ; 2173,-1133.5 2173,-523.5 ; 3440,-726.83 3440,-523.5 ; 4280,-726.83 4280,-523.5 ; 4902,-1140 4902,-937.17
  text "ALL ARTWORK VIEWED FROM TOP SIDE" at -228.5,-655.67 h60
  text "BOARD #:" at 2248,-655.67 h60
  text ".PRJ_Number" at 2793.5,-655.67 h60
  text "REV:" at 3638,-655.67 h60
  text ".PCB_Rev" at 3929.5,-655.67 h60
  text "SVN REV:" at 4476,-655.67 h60
  text ".VersionControl_RevNumber" at 4982,-655.67 h60
  text "LAYER NAME =" at -228.5,-858.49 h60
  text "TID #:" at 2248,-859 h60
  text ".TID" at 2793.5,-859 h60
  text "PLOT NAME =" at -228.5,-1064.34 h60
  text ".plot_File_Name" at 577,-1064.34 h60
  text "GENERATED    :" at 2250,-1064.34 h60
  text ".Print_Date" at 3119.5,-1064.34 h60
  text ".Print_Time" at 3848.5,-1064.34 h60
  text "TEXAS INSTRUMENTS" at 5113,-1064.34 h60
M12 Stackup:
  drawing of 191 lines, arcs and shapes, not listed
  text "Layer" at 9811.09,7573 h60
  text "Name" at 10221,7573 h60
  text "Material" at 11150.74,7573 h60
  text "Thickness" at 12010.51,7573 h60
  text "Constant" at 12660.35,7573 h60
  text "Board Layer Stack" at 13230.21,7573 h60
  text "1" at 9811.09,7453 h60
  text "Top Overlay" at 10221,7453 h60
  text "2" at 9811.09,7333 h60
  text "Top Solder" at 10221,7333 h60
  text "Solder Resist" at 11150.74,7333 h60
  text "0.40mil" at 12010.51,7333 h60
  text "3.5" at 12660.35,7333 h60
  text "3" at 9811.09,7213 h60
  text "Top Layer" at 10221,7213 h60
  text "Copper" at 11150.74,7213 h60
  text "1.40mil" at 12010.51,7213 h60
  text "4" at 9811.09,7093 h60
  text "Dielectric1" at 10221,7093 h60
  text "FR-4 High Tg" at 11150.74,7093 h60
  text "59.20mil" at 12010.51,7093 h60
  text "4.8" at 12660.35,7093 h60
  text "5" at 9811.09,6973 h60
  text "Bottom Layer" at 10221,6973 h60
  text "Copper" at 11150.74,6973 h60
  text "1.40mil" at 12010.51,6973 h60
  text "6" at 9811.09,6853 h60
  text "Bottom Solder" at 10221,6853 h60
  text "Solder Resist" at 11150.74,6853 h60
  text "0.40mil" at 12010.51,6853 h60
  text "3.5" at 12660.35,6853 h60
  text "7" at 9811.09,6733 h60
  text "Bottom Overlay" at 10221,6733 h60
M13 Component Bodies Top:
  text ".Layer_Name" at 577,-858.49 h60
M14 Component Bodies Bottom:
  text ".Layer_Name" at 577,-858.49 h60
M15 Courtyards Top:
  text ".Layer_Name" at 577,-858.49 h60
M16 Courtyards Bottom:
  text ".Layer_Name" at 577,-858.49 h60
Drill Drawing:
  circle w10: c1346.72,966.24 r27.63
  lines w10: 1319.09,1118.19 1374.34,1118.19 1346.72,1062.94 1319.09,1118.19
  lines w12: 1269,901.32 4500.49,901.32 ; 1269,1149.96 4500.49,1149.96 ; 1606.86,777 1606.86,1274.28 ; 1938.86,777 1938.86,1274.28 ; 2575.43,777 2575.43,1274.28 ; 2834.57,777 2834.57,1274.28 ; 3209.72,777 3209.72,1274.28 ; 3934.05,777 3934.05,1274.28 ; 1269,777 4500.49,777 4500.49,1274.28 1269,1274.28 1269,777
  text "Symbol" at 1343.59,1187.26 h72
  text "Quantity" at 1644.16,1187.26 h72
  text "Finished Hole Size" at 1976.16,1187.26 h72
  text "Plated" at 2612.72,1187.26 h72
  text "Hole Type" at 2871.86,1187.26 h72
  text "Drill Layer Pair" at 3247.02,1187.26 h72
  text "Hole Tolerance" at 3971.35,1187.26 h72
  text "19" at 1644.16,1062.94 h60
  text "10.00mil (0.254mm)" at 1976.16,1062.94 h60
  text "PTH" at 2612.72,1062.94 h60
  text "Round" at 2871.86,1062.94 h60
  text "Top Layer - Bottom Layer" at 3247.02,1062.94 h60
  text "14" at 1644.16,938.62 h60
  text "40.16mil (1.020mm)" at 1976.16,938.62 h60
  text "PTH" at 2612.72,938.62 h60
  text "Round" at 2871.86,938.62 h60
  text "Top Layer - Bottom Layer" at 3247.02,938.62 h60
  text "33 Total" at 1644.16,814.3 h60
  text "Tolerance:" at 1317,629 h50
  text "For 10 mil +0/-10mil" at 1317,495 h50
  text "For PTH +/-3mil" at 1317,397 h50
  text ".Layer_Name" at 577,-858.49 h60
M17 Embedded Cavity:
  text ".Layer_Name" at 577,-858.49 h60
M18 Embedded Assembly:
  text ".Layer_Name" at 577,-858.49 h60
M19 Embedded Keepout:
  text ".Layer_Name" at 577,-858.49 h60

## Dimensions
0,0 to 900,0 on M2 Board Dimensions
0,900 to 0,0 on M2 Board Dimensions
0,-400 to 1000,-400 on M2 Board Dimensions

## Text inside footprints (layer, text, board x,y; h text height)
Logo2: Bottom Overlay "Pb" at 476.1,779.4 h60 r270
ZZ1: M5 Assembly Top "Install label in silkscreened box after final wash.  Text shall be 8 pt font.  Text shall be per the Label Table in the PDF schematic." at 230,3918 h40